# Altium PCB PCB1.PcbDoc
Units mil, origin at the board's own origin, x right, y up, seen from the top; angles counter-clockwise.
Board outline 2485 x 2065 mil, 2 copper layers (Top Layer, Bottom Layer); 29 components, 20 nets, 92 pads, 14 vias.
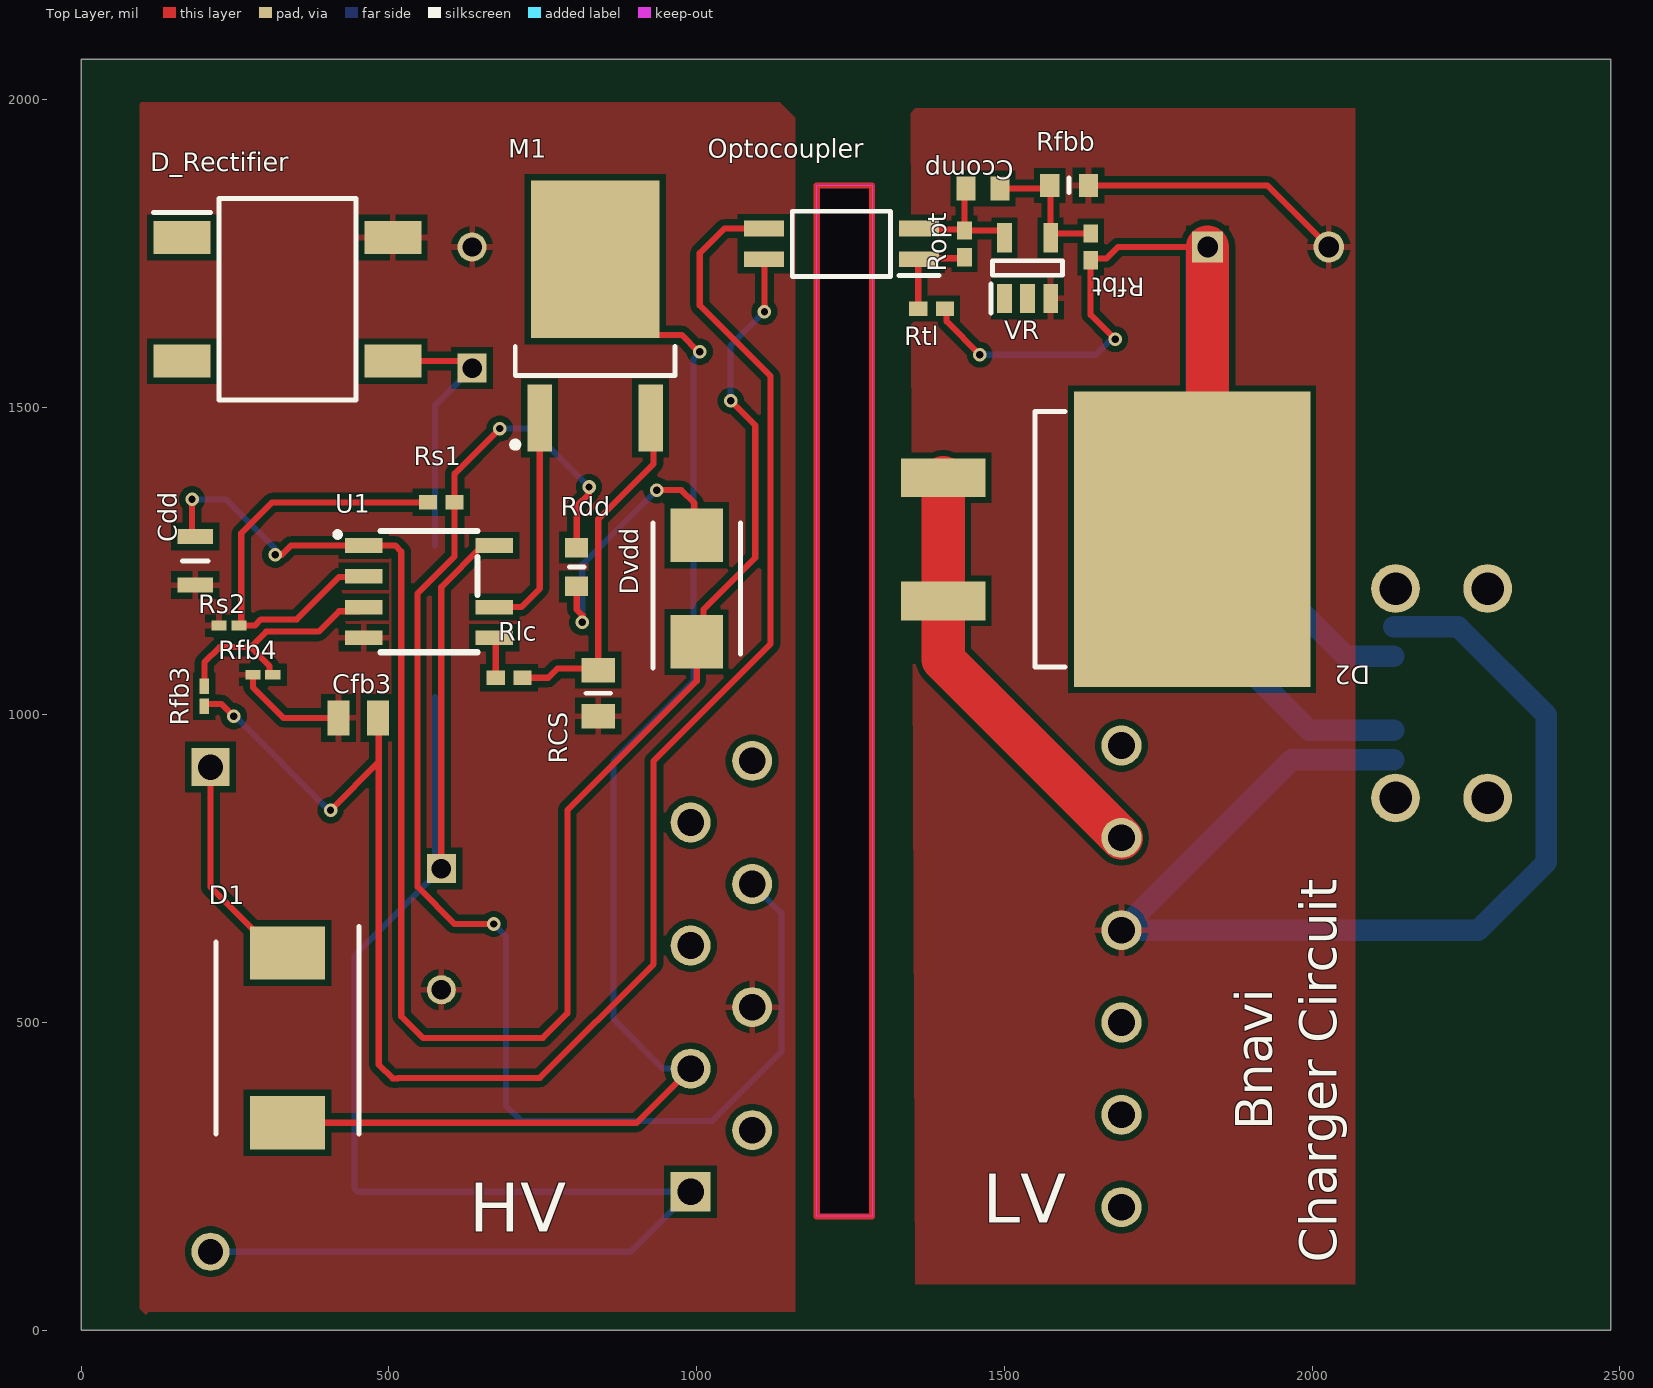
[diagram p0: Top Layer view]
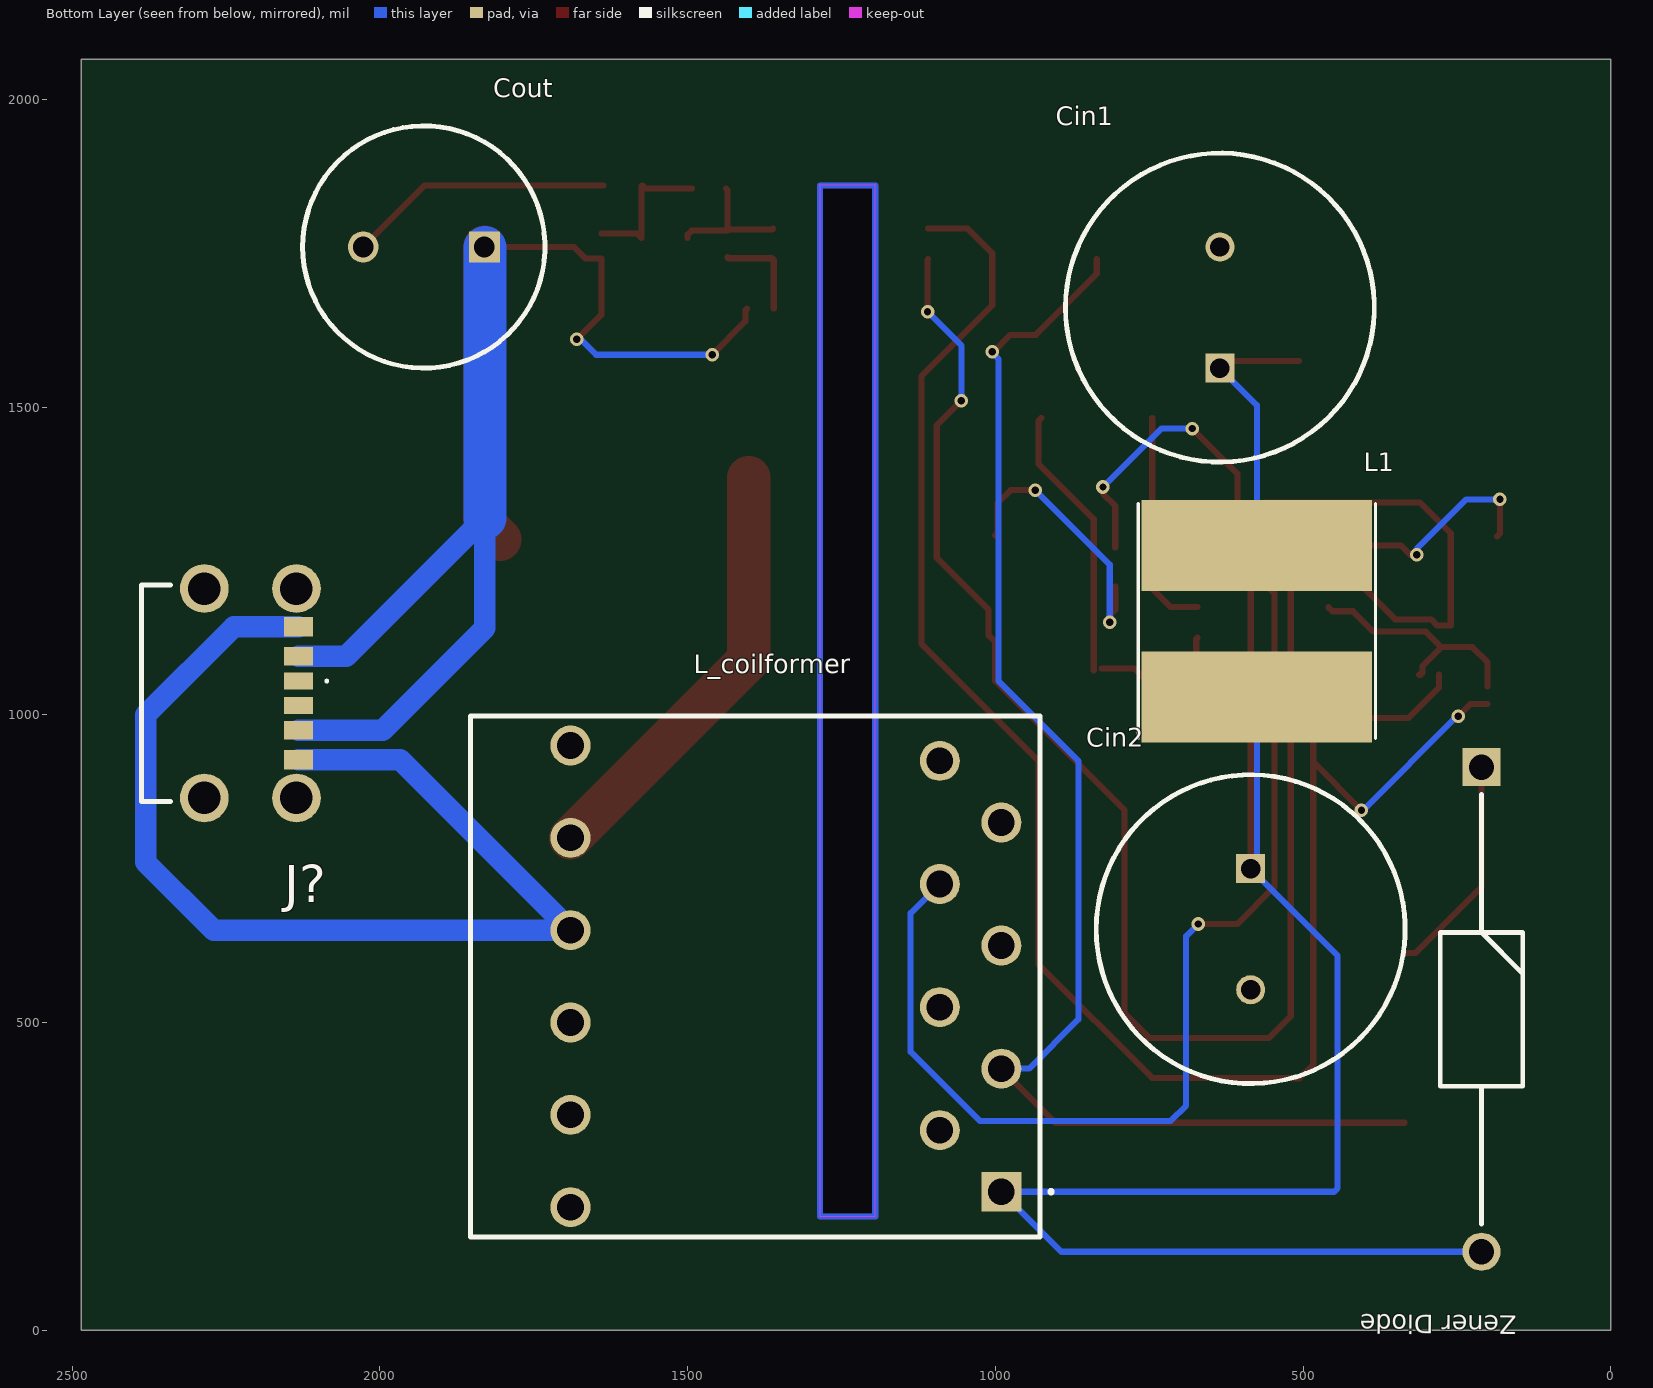
[diagram p1: Bottom Layer view, seen from below]
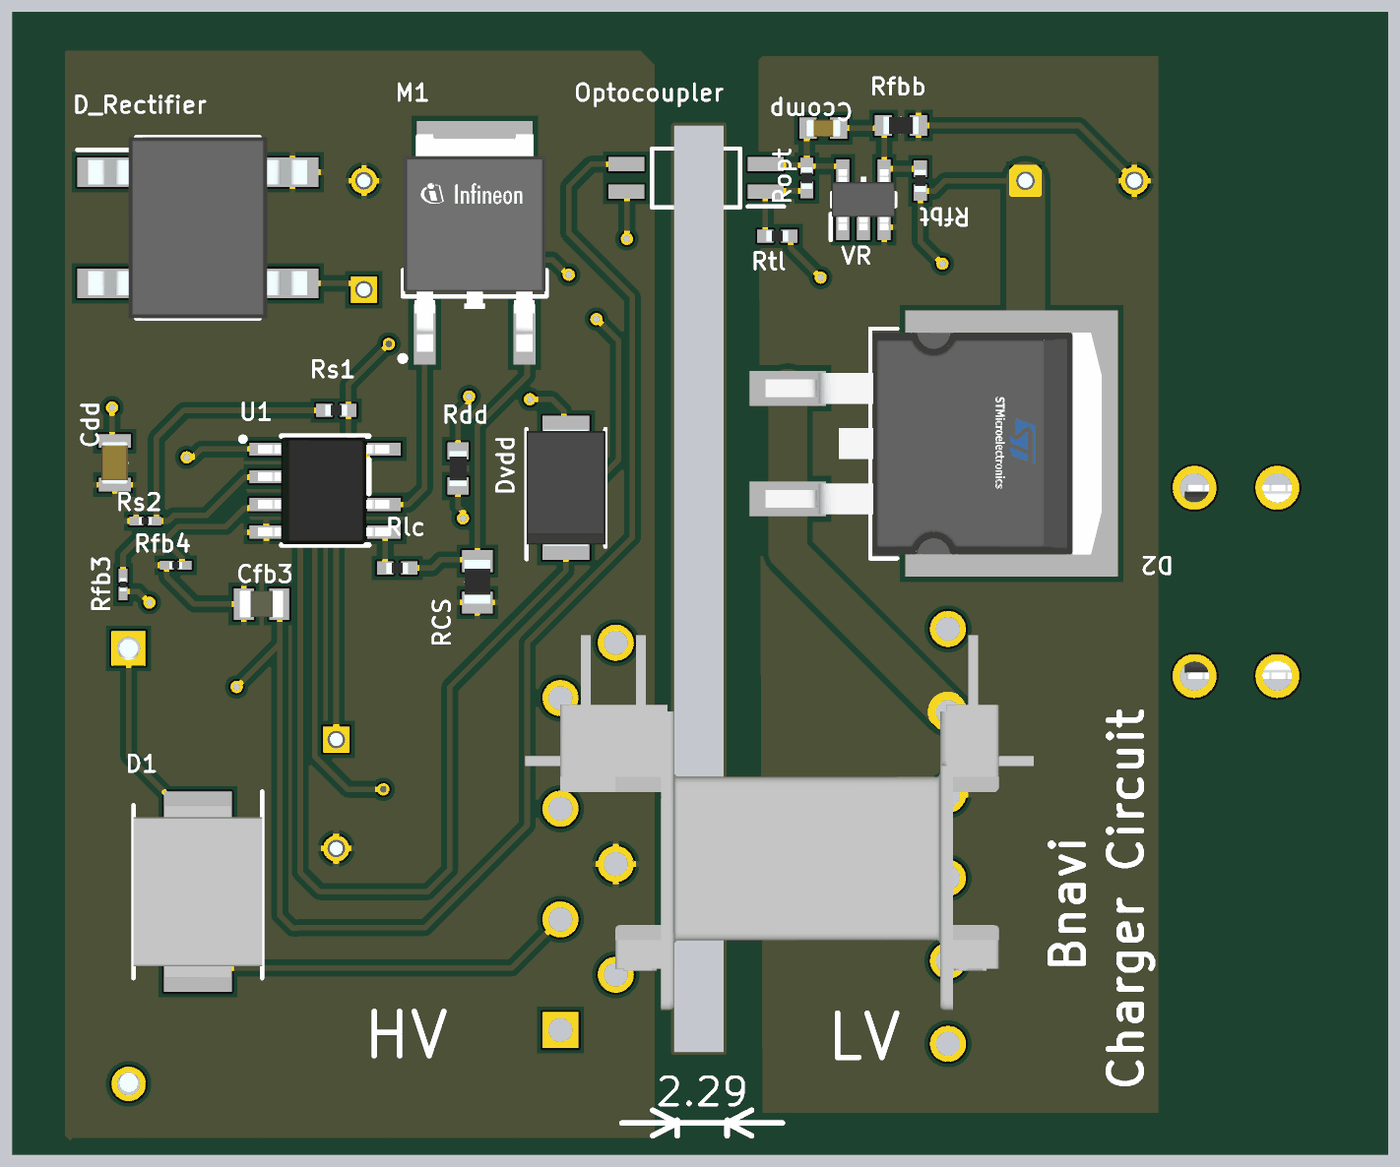
[diagram p2: 3D render of the assembled board from above, using the file's embedded part models]
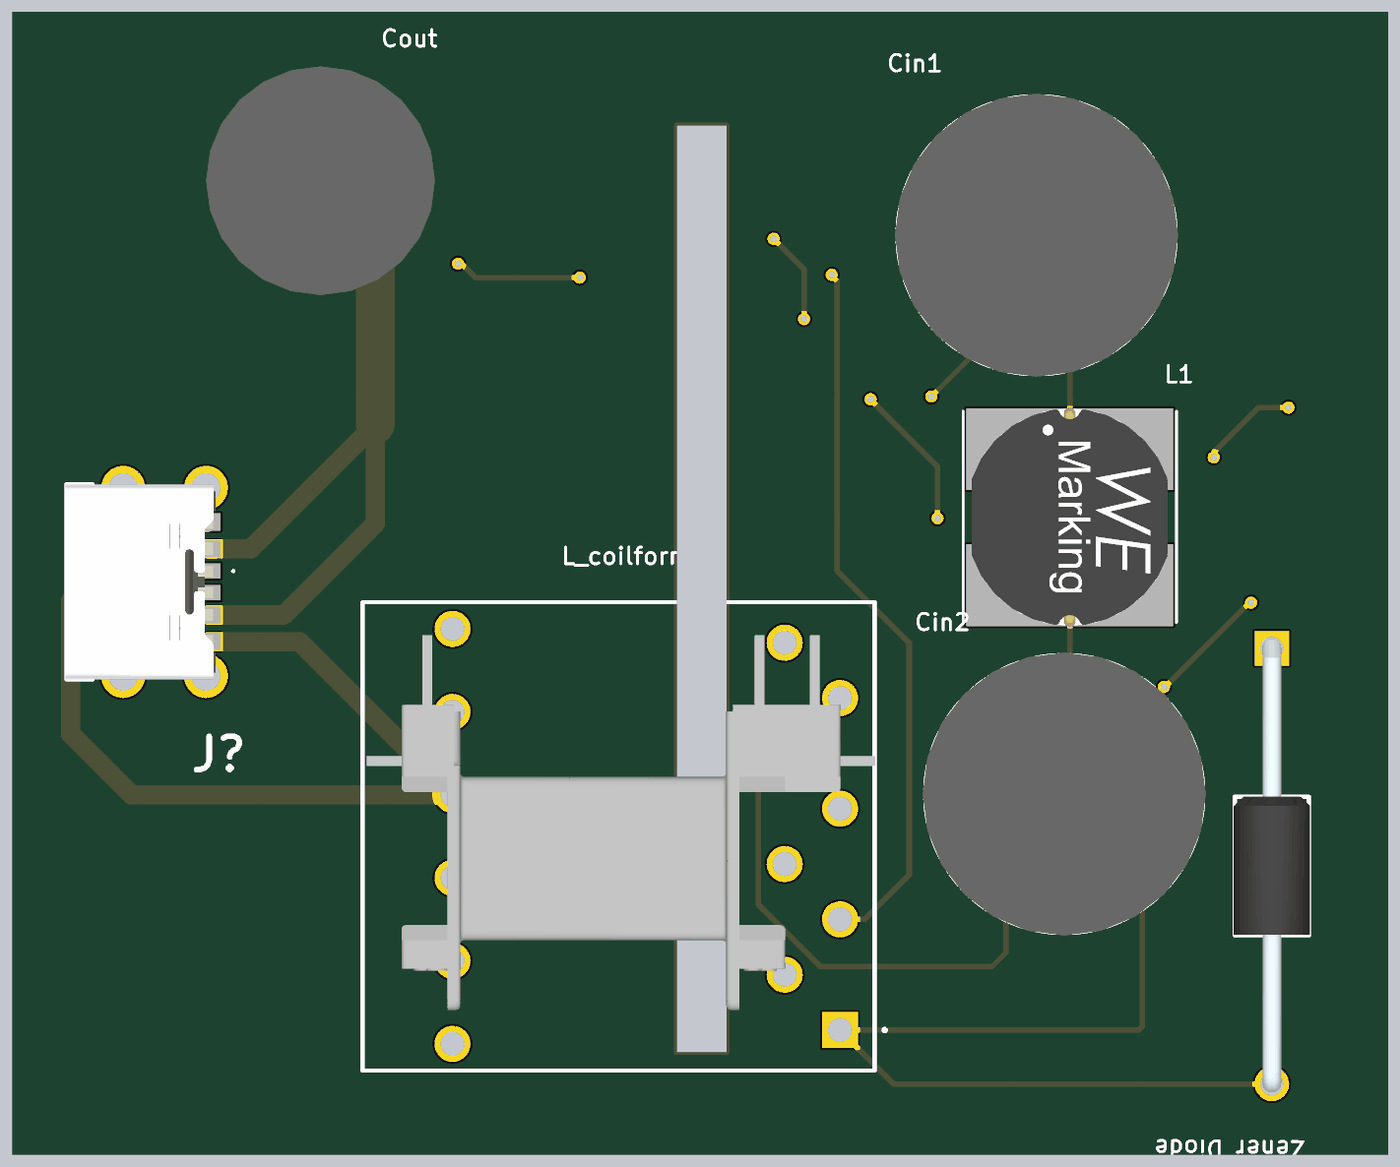
[diagram p3: 3D render of the assembled board from below, using the file's embedded part models]

## Layer stack, top to bottom
Top Solder: solder mask 0.4, Solder Resist, Dk 3.5
Top Layer: signal copper 1.4
Dielectric 1: dielectric 12.6, FR-4, Dk 4.8
Bottom Layer: signal copper 1.4
Bottom Solder: solder mask 0.4, Solder Resist, Dk 3.5

## Board outline
2485,2065 2485,0 0,0 0,2065
cut-out: 1195,185 1195,1860 1285,1860 1285,185

## Design rules (kind name [scope] priority, off if disabled: settings)
Clearance [All] p1: gap=10 ignorepadtopadclearanceinfootprint=FALSE except(0: Arc-Hole Track-Hole SMDPad-Hole THPad-Hole Via-Hole Fill-Hole Poly-Hole Region-Hole Text-Hole)
PolygonConnect [All] p1: connectstyle=Relief reliefconductorwidth=10 reliefentries=4 polygonreliefangle="90 Angle" airgapwidth=10
RoomDefinition Charger_group2 [InComponentClass('Charger_group2')] p1: confinementstyle=ConfineIn formatcopy=TRUE lockcomponents=FALSE outline -865,-3030 1135,-3030 1135,-2030 -865,-2030
RoutingVias [All] p1: holewidth=28 width=50 viastyle="Through Hole" minholewidth=28 minwidth=50 maxholewidth=28 maxwidth=50
SolderMaskExpansion [All] p1: expansion=4 istentingtop=FALSE
Width [All] p1: maxlimit=10 minlimit=10 preferedwidth=10
30 further rules are at their usual default settings.

## Components (designator, comment, footprint, x,y, rotation, side; value= is the part's Value field where it differs from the comment)
Ccomp "850 pf" CAPC1608X90N 1465,1855 r180 top
Cdd "4.7 uF" CAPC2012X145N 185,1250 r90 top
Cfb3 "100nF" CAPC2013X94N 450,995 r180 top
Cin1 "22 uF" CAPPRD500W60D1275H2200 635,1563.15 r90 bottom
Cin2 "22 uF" CAPPRD500W60D1275H2200 585,750 r270 bottom
Cout "1000 uF" CAPPRD500W65D1000H2700 1830,1760 r0 bottom
D1 "VF@Io =1.12V" DIOM7959X262N 335,475 r270 top
D2 "STPS20M100SG-TR" FP-STPS20M100SG-TR-MFG 1664.25,1285 r270 top
D_Rectifier "DF10SA-E3_77" SOP510P1005X330-4N 335,1675 r0 top
Dvdd "VF@Io =1.2V" DIOM5436X330N 1000,1205 r90 top
J? "USB4125-GF-A-0190" USB4125GFA0190 2253.5,1034.92 r270 bottom
L1 "470 uH" WE-PD2_105455 575,1151.97 r270 bottom
L_coilformer "B66206C1014T001" B66206C1014T001 990,225 r180 bottom
M1 "IPD80R1K0CE" TO229P994X241-3N 835,1611.06 r90 top
Optocoupler "PS2811-1-F3-K-A" SOIC127P700X210-4N 1235,1765 r180 top
RCS "910 mOhm" RESC2012X60N 840,1035 r90 top
Rdd "22 Ohm" RESC1608X55N 805,1240 r270 top
Rfb3 "18.7 kOhm" RESC0603X26N 200,1030 r90 top
Rfb4 "18.7 kOhm" RESC0603X26N 295,1065 r180 top
Rfbb "39 kOhm" RESC1608X55N 1605,1860 r180 top
Rfbt "118 kOhm" RESC1005X40N 1640,1760 r270 top
Rlc "2.15 kOhm" RESC1005X40N 695,1060 r0 top
Ropt "1 kOhm" RESC1005X40N 1435,1765 r90 top
Rs1 "118 KOhm" RESC1005X40N 585,1345 r180 top
Rs2 "36.5 kohm" RESC0603X26N 240,1145 r0 top
Rtl "1.07 kOhm" RESC1005X40N 1381.65,1660 r0 top
U1 "UCC28740DR" D(R-PDSO-G7) 565,1200 r270 top
VR "LMV431CM5_NOPB" SOT95P280X145-5N 1537.4,1725.79 r90 top
"Zener Diode" "P6KE110A-E3_54" DIOAD1995W86L635D340 210,915 r270 bottom

## Footprints (in the part's own frame and the unit in brackets; to place one, negate y for a bottom-side part, rotate by r counter-clockwise, add the part's x,y. Pads: shape width x height; smd on the part's side, far side on the other; paste and mask are expansions set on the pad)
B66206C1014T001 [mm]
  rect 1.65x1.65 hole 1.1: 1(0,0)
  round 1.65 hole 1.1: 2(-2.54,2.54) 3(0,5.08) 4(-2.54,7.62) 5(0,10.16) 6(-2.54,12.7) 7(0,15.24) 8(-2.54,17.78) 9(-17.78,18.415) 10(-17.78,14.605) 11(-17.78,10.795) 12(-17.78,6.985) 13(-17.78,3.175) 14(-17.78,-0.635)
  silkscreen extent -21.91,-1.86 2.1,19.64, body extent -21.72,0.93 1.62,18.13, height 10.75
CAPC1608X90N [mm]
  rect 0.78x0.99 smd: 1(-0.7,0) 2(0.7,0)
  body extent -0.8,-0.41 0.8,0.41, height 0.9
CAPC2012X145N [mm]
  rect 0.62x1.47 smd: 1(-1,0) 2(1,0)
  silkscreen extent 0,-0.53 0,0.53, body extent -1,-0.63 1,0.63, height 1.45
CAPC2013X94N [mil]
  rect 36x57 smd: 1(-32,0) 2(32,0)
  body extent -40,-25 40,25, height 37
CAPPRD500W60D1275H2200 [mm]
  rect 1.2x1.2 hole 0.8: 1(0,0)
  round 1.2 hole 0.8: 2(5,0)
  silkscreen extent -3.87,-6.37 8.87,6.38, body extent -4,-6.5 9,6.5, height 22
CAPPRD500W65D1000H2700 [mm]
  rect 1.275x1.275 hole 0.85: 1(0,0)
  round 1.275 hole 0.85: 2(5,0)
  silkscreen extent -2.5,-5 7.5,5, body extent -2.75,-5.25 7.75,5.25, height 27
D(R-PDSO-G7) [mm]
  rect 0.6x1.55 smd: 1(-1.905,-2.7) 2(-0.635,-2.7) 3(0.635,-2.7) 4(1.905,-2.7) 5(1.905,2.7) 6(0.635,2.7) 7(-1.905,2.7)
  silkscreen extent -2.5,-3.86 2.5,2, body extent -2.45,-3.08 2.45,2.94, height 1.63
DIOAD1995W86L635D340 [mm]
  rect 1.575x1.575 hole 1.05: 1(0,0)
  round 1.575 hole 1.05: 2(20,0)
  silkscreen extent 1.14,-1.7 18.86,1.7, body extent -0.43,-1.75 20.38,1.75, height 3.5
DIOM5436X330N [mm]
  rect 2.2x2.15 smd: 1(-2.2,0) 2(2.2,0)
  silkscreen extent -3.27,-1.81 2.7,1.81, body extent -2.7,-1.81 2.7,1.81, height 3.3
DIOM7959X262N [mm]
  rect 2.2x3.1 smd: 1(-3.5,0) 2(3.5,0)
  silkscreen extent -4.6,-2.95 3.97,2.95, body extent -3.97,-2.95 3.97,2.95, height 2.31
FP-STPS20M100SG-TR-MFG [mm]
  rect 1.6x3.5 smd paste+0 mask+0: 1(-2.54,-6.7) 3(2.54,-6.7)
  rect 12.2x9.75 smd paste+0 mask+0: 4(0,3.575)
  silkscreen extent -5.28,-2.91 5.28,-1.68, body extent -6.2,-8.55 6.2,8.55, height 0.25
RESC0603X26N [mm]
  rect 0.625x0.4 smd: 1(-0.412,0) 2(0.412,0)
  body extent -0.3,-0.15 0.3,0.15, height 0.26
RESC1005X40N [mm]
  rect 0.75x0.6 smd: 1(-0.55,0) 2(0.55,0)
  body extent -0.5,-0.25 0.5,0.25, height 0.4
RESC1608X55N [mm]
  rect 0.8x0.95 smd: 1(-0.8,0) 2(0.8,0)
  silkscreen extent 0,-0.3 0,0.3, body extent -0.8,-0.4 0.8,0.4, height 0.55
RESC2012X60N [mm]
  rect 1x1.4 smd: 1(-0.95,0) 2(0.95,0)
  silkscreen extent 0,-0.5 0,0.5, body extent -1,-0.6 1,0.6, height 0.6
SOIC127P700X210-4N [mm]
  rect 1.65x0.65 smd: 1(-3.2,0.635) 2(-3.2,-0.635) 3(3.2,-0.635) 4(3.2,0.635)
  silkscreen extent -4.03,-1.35 2.02,1.35
SOP510P1005X330-4N [mm]
  rect 2.35x1.35 smd: 1(-4.35,2.55) 2(-4.35,-2.55) 3(4.35,-2.55) 4(4.35,2.55)
  silkscreen extent -5.53,-4.16 2.83,4.16, body extent -5.02,-4.16 5.02,4.16, height 3.3
SOT95P280X145-5N [mm]
  rect 1.2x0.6 smd: 1(-1.25,0.95) 2(-1.25,0) 3(-1.25,-0.95) 4(1.25,-0.95) 5(1.25,0.95)
  silkscreen extent -1.85,-1.45 0.3,1.5, body extent -1.4,-1.45 1.4,1.45, height 1.2
TO229P994X241-3N [mm] "TO,2.29mm pitch;2 pin,9.94mm L X 6.095mm W X 2.41mm H body"
  rect 2.75x1 smd paste+0 mask+0: 1(-3.275,2.29) 3(-3.275,-2.29)
  rect 6.5x5.3 smd paste+0 mask+0: 2(3.275,0)
  silkscreen extent -4.5,-3.3 -0.32,3.42, body extent -4.06,-3.25 5.92,3.25, height 2.36
USB4125GFA0190 [mm]
  rect 0.7x1.2 smd: A5(-0.5,3.08) B5(0.5,3.08)
  rect 0.76x1.2 smd: A9(1.52,3.08) B9(-1.52,3.08)
  rect 0.8x1.2 smd: A12(2.75,3.08) B12(-2.75,3.08)
  round 2.01 hole 1.34: MH1(-4.32,3) MH2(-4.32,-0.8) MH3(4.32,-0.8) MH4(4.32,3)
  silkscreen extent -4.47,-3.4 4.47,4.3, body extent -4.47,-3.45 4.47,3.45, height 3.26
WE-PD2_105455 [mm]
  rect 3.75x9.5 smd: 1(-3.125,0) 2(3.125,0)
  silkscreen extent -4.86,-4.89 4.84,4.89, body extent -5.04,-4.5 5.05,4.5, height 5.4

## Part data
Ccomp: library part 06031C851JAT2A, "Capacitor", Manufacturer_Name=AVX, Mouser Part Number=581-06031C851JAT2A, Datasheet Link=https://componentsearchengine.com/Datasheets/1/06031A100FAT2A.pdf, Height=0.9mm, Manufacturer_Part_Number=06031C851JAT2A, Mouser Price/Stock=https://www.mouser.co.uk/ProductDetail/AVX/06031C851JAT2A?qs=Q0wCMCRSJ1uRTlT%2F3ACAEg%3D%3D
Cdd: library part CGA4J1X7R1V475K125AC, "Capacitor", Manufacturer_Name=TDK, Mouser Part Number=810-CGA4J1X7R1V475KC, Arrow Part Number=CGA4J1X7R1V475K125AC, Arrow Price/Stock=https://www.arrow.com/en/products/cga4j1x7r1v475k125ac/tdk, Datasheet Link=https://product.tdk.com/system/files/dam/doc/product/capacitor/ceramic/mlcc/catalog/mlcc_automotive_general_en.pdf, Height=1.45mm, Manufacturer_Part_Number=CGA4J1X7R1V475K125AC, Mouser Price/Stock=https://www.mouser.co.uk/ProductDetail/TDK/CGA4J1X7R1V475K125AC/?qs=xLDY6iXSiQZ6d6YyEJDECQ%3D%3D
Cfb3: library part 08053C104JAZ2A, "Capacitor", Manufacturer_Name=AVX, Mouser Part Number=581-08053C104JAZ2A, Arrow Part Number=08053C104JAZ2A, Arrow Price/Stock=https://www.arrow.com/en/products/08053c104jaz2a/avx, Manufacturer_Part_Number=08053C104JAZ2A, Mouser Price/Stock=https://www.mouser.co.uk/ProductDetail/AVX/08053C104JAZ2A?qs=YtXa1zY%252Bjw7108MDhSwtdw%3D%3D
Cin1 Cin2: library part 400PK22MEFC12.5X20, "Capacitor Polarised", Manufacturer_Name=Rubycon, Mouser Part Number=232-400PK22MEFC125X2, Datasheet Link=http://www.rubycon.co.jp/en/catalog/e_pdfs/aluminum/e_pk.pdf, Height=22mm, Manufacturer_Part_Number=400PK22MEFC12.5X20, Mouser Price/Stock=https://www.mouser.co.uk/ProductDetail/Rubycon/400PK22MEFC12.5X20?qs=T3oQrply3y%252B1A0DQVCmdTw%3D%3D
Cout: library part EEU-FC1C102, "Capacitor Polarised", Manufacturer_Name=Panasonic, Mouser Part Number=667-EEU-FC1C102, Arrow Part Number=EEU-FC1C102, Arrow Price/Stock=https://www.arrow.com/en/products/eeu-fc1c102/panasonic, Datasheet Link=http://industrial.panasonic.com/cdbs/www-data/pdf/RDF0000/ABA0000C1209.pdf, Height=27mm, Manufacturer_Part_Number=EEU-FC1C102, Mouser Price/Stock=https://www.mouser.co.uk/ProductDetail/Panasonic/EEU-FC1C102/?qs=bcjYS4nEpcecXuFNFyrCMQ%3D%3D
D1: library part CD214C-F3600, "Diode", Manufacturer_Name=Bourns, Mouser Part Number=652-CD214C-F3600, Arrow Part Number=CD214C-F3600, Arrow Price/Stock=https://www.arrow.com/en/products/cd214c-f3600/bourns, Datasheet Link=https://datasheet.datasheetarchive.com/originals/distributors/SFDatasheet-7/sf-000140118.pdf, Height=2.62mm, Manufacturer_Part_Number=CD214C-F3600, Mouser Price/Stock=https://www.mouser.co.uk/ProductDetail/Bourns/CD214C-F3600?qs=TkkmMb5HBbQTesSVRPXLkQ%3D%3D
D2: library part CMP-12187-000010-1, "DIODE SCHOTTKY 100V 20A D2PAK", Forward Current=20A, Manufacturer=STMicroelectronics, Max Junction Temp=+150°C, Max Repetitive Reverse Voltage=100V, Max Surge Forward Current=350A, Peak Reverse Current=10uA, Temperature="to +150°C", Automotive=No, Category=Diode, ComponentLink2Description=Datasheet, ComponentLink2URL=https://www.st.com/resource/en/datasheet/stps20m100s.pdf, Device Class L1="Discrete Semiconductors", Device Class L2=Diodes, Device Class L3="Schottky Diodes", Digikey Description="DIODE SCHOTTKY 100V 20A D2PAK", Height=4.85mm, Lead Free=Yes, Manufacturer Part Number=STPS20M100SG-TR, Mouser Description="Schottky Diodes & Rectifiers 20A 100V", Octopart=https://octopart.com/stps20m100sg-tr-stmicroelectronics-17669033, Package=STPS20M100SG-TR, RoHS=TRUE, Standoff Height=0mm, Temperature Range High=+150°C
D_Rectifier: "Diode", Arrow Part Number=DF10SA-E3/77, Manufacturer_Name=Vishay, Mouser Part Number=625-DF10SA-E3, Arrow Price/Stock=https://www.arrow.com/en/products/df10sa-e377/vishay?region=nac, Datasheet Link=http://uk.rs-online.com/web/p/products/7005403, Height=3.3mm, Manufacturer_Part_Number=DF10SA-E3/77, Mouser Price/Stock=https://www.mouser.co.uk/ProductDetail/Vishay-General-Semiconductor/DF10SA-E3-77?qs=lTgc38YOCCojApEJ5g6z7g%3D%3D
Dvdd: library part UFS180Je3_TR13, "Diode", Arrow Part Number=UFS180JE3/TR13, Manufacturer_Name="Microsemi Corporation", Manufacturer_Part_Number=UFS180Je3/TR13, Mouser Part Number=494-UFS180JE3/TR13, Arrow Price/Stock=https://www.arrow.com/en/products/ufs180je3tr13/microsemi, Datasheet Link=https://media.digikey.com/pdf/Data%20Sheets/Microsemi%20PDFs/UFS160J-UFS180J.pdf, Height=3.3mm, Mouser Price/Stock=https://www.mouser.co.uk/ProductDetail/Microchip-Microsemi/UFS180Je3-TR13?qs=pU29NIZ4ZwBQwIY5BrOkmA%3D%3D
J?: "Connector", Manufacturer_Name="GCT (GLOBAL CONNECTOR TECHNOLOGY)", Mouser Part Number=640-USB4125-GF-A-190, Datasheet Link=https://eu.mouser.com/datasheet/2/837/usb4125-2448699.pdf, Height=3.41mm, Manufacturer_Part_Number=USB4125-GF-A-0190, Mouser Price/Stock=https://www.mouser.co.uk/ProductDetail/GCT/USB4125-GF-A-0190?qs=QNEnbhJQKvbCz4hEJBS24w%3D%3D
L1: library part 744776247, "Inductor", Manufacturer_Name="Wurth Elektronik", Mouser Part Number=710-744776247, Manufacturer_Part_Number=744776247, Mouser Price/Stock=https://www.mouser.com/Search/Refine.aspx?Keyword=710-744776247
L_coilformer: "Inductor", Manufacturer_Name=TDK, Datasheet Link=https://product.tdk.com/system/files/dam/doc/product/ferrite/ferrite/ferrite-acc/data_sheet/80/db/fer/e_20_10_6.pdf, Height=13.9mm, Manufacturer_Part_Number=B66206C1014T001
M1: "CoolMos CE 800V Power Transistor", Manufacturer="Infineon Technologies", ManufacturerPartNumber=IPD80R1K0CE, PackageReference="PG-TO252 (DPAK)"
Optocoupler: "Integrated Circuit", Manufacturer_Name=CEL, Mouser Part Number=551-PS2811-1-F3-K-A, Arrow Part Number=PS2811-1-F3-K-A, Arrow Price/Stock=https://www.arrow.com/en/products/ps2811-1-f3-k-a/california-eastern-laboratories, Datasheet Link=https://datasheet.datasheetarchive.com/originals/distributors/Datasheets_SAMA/e00520b14130937508b53ebe3d73e62e.pdf, Height=2.1mm, Manufacturer_Part_Number=PS2811-1-F3-K-A, Mouser Price/Stock=https://www.mouser.com/Search/Refine.aspx?Keyword=551-PS2811-1-F3-K-A
RCS: library part CRM0805-FX-R910ELF, "Resistor", Manufacturer_Name=Bourns, Mouser Part Number=652-CRM0805FXR910ELF, Arrow Part Number=CRM0805-FX-R910ELF, Arrow Price/Stock=https://www.arrow.com/en/products/crm0805-fx-r910elf/bourns, Datasheet Link=http://www.bourns.com/data/global/pdfs/CRM0805_1206_2010.pdf, Height=0.6mm, Manufacturer_Part_Number=CRM0805-FX-R910ELF, Mouser Price/Stock=https://www.mouser.co.uk/ProductDetail/Bourns/CRM0805-FX-R910ELF?qs=%2FxfeZyN5VBe746z4RDJfyw%3D%3D
Rdd: library part RC0603FR-0722RL, "Resistor", Manufacturer_Name=YAGEO, Mouser Part Number=603-RC0603FR-0722RL, Datasheet Link=http://www.farnell.com/datasheets/1868787.pdf, Height=0.55mm, Manufacturer_Part_Number=RC0603FR-0722RL, Mouser Price/Stock=https://www.mouser.co.uk/ProductDetail/YAGEO/RC0603FR-0722RL?qs=diQw95jMAeMOsxb8bne7fg%3D%3D
Rfb3: library part RC0201FR-07205KL, "Resistor", Manufacturer_Name=YAGEO, Mouser Part Number=603-RC0201FR-07205KL, Arrow Part Number=RC0201FR-07205KL, Arrow Price/Stock=https://www.arrow.com/en/products/rc0201fr-07205kl/yageo?region=nac, Datasheet Link=https://www.arrow.com/en/products/rc0201fr-07205kl/yageo?region=nac, Height=0.26mm, Manufacturer_Part_Number=RC0201FR-07205KL, Mouser Price/Stock=https://www.mouser.co.uk/ProductDetail/YAGEO/RC0201FR-07205KL?qs=Q4gDqC5t5%2FBvVGk%2FbPsM0A%3D%3D
Rfb4: library part RC0201FR-0718K7L, "Resistor", Manufacturer_Name=KEMET, Mouser Part Number=603-RC0201FR-0718K7L, Arrow Part Number=RC0201FR-0718K7L, Arrow Price/Stock=https://www.arrow.com/en/products/rc0201fr-0718k7l/yageo?region=nac, Datasheet Link=https://datasheet.datasheetarchive.com/originals/distributors/Datasheets_SAMA/902f9e387b938f871d31120f5fc1d65e.pdf, Height=0.26mm, Manufacturer_Part_Number=RC0201FR-0718K7L, Mouser Price/Stock=https://www.mouser.co.uk/ProductDetail/YAGEO/RC0201FR-0718K7L?qs=Q4gDqC5t5%2FBha9qkI2Bozg%3D%3D
Rfbb: library part RC0603FR-0739KL, "Resistor", Manufacturer_Name=KEMET, Mouser Part Number=603-RC0603FR-0739KL, Datasheet Link=https://datasheet.datasheetarchive.com/originals/distributors/Datasheets_SAMA/902f9e387b938f871d31120f5fc1d65e.pdf, Height=0.55mm, Manufacturer_Part_Number=RC0603FR-0739KL, Mouser Price/Stock=https://www.mouser.co.uk/ProductDetail/Yageo/RC0603FR-0739KL?qs=diQw95jMAeOP2wB%2FELd%252BCQ%3D%3D
Rfbt Rs1: library part CRCW0402118KFKED, "Resistor", Manufacturer_Name=Vishay, Mouser Part Number=71-CRCW0402-118K-E3, Arrow Part Number=CRCW0402118KFKED, Arrow Price/Stock=https://www.arrow.com/en/products/crcw0402118kfked/vishay, Datasheet Link=http://www.vishay.com/docs/20035/dcrcwe3.pdf, Height=0.4mm, Manufacturer_Part_Number=CRCW0402118KFKED, Mouser Price/Stock=https://www.mouser.co.uk/ProductDetail/Vishay-Dale/CRCW0402118KFKED?qs=rlE3Te1NifzlSy4FZiG4wQ%3D%3D
Rlc: library part CRCW04022K15FKED, "Resistor", Manufacturer_Name=Vishay, Mouser Part Number=71-CRCW0402-2.15K-E3, Arrow Part Number=CRCW04022K15FKED, Arrow Price/Stock=https://www.arrow.com/en/products/crcw04022k15fked/vishay, Datasheet Link=http://www.vishay.com/docs/20035/dcrcwe3.pdf, Height=0.4mm, Manufacturer_Part_Number=CRCW04022K15FKED, Mouser Price/Stock=https://www.mouser.co.uk/ProductDetail/Vishay-Dale/CRCW04022K15FKED?qs=hD42E%2F8yzjpq6GeA3TML6Q%3D%3D
Ropt: library part CRCW04021K00FKEDHP, "Resistor", Manufacturer_Name=Vishay, Mouser Part Number=71-CRCW04021K00FKEDH, Arrow Part Number=CRCW04021K00FKEDHP, Arrow Price/Stock=https://www.arrow.com/en/products/crcw04021k00fkedhp/vishay?region=nac, Datasheet Link=http://www.vishay.com/docs/20035/dcrcwe3.pdf, Height=0.4mm, Manufacturer_Part_Number=CRCW04021K00FKEDHP, Mouser Price/Stock=https://www.mouser.co.uk/ProductDetail/Vishay-Dale/CRCW04021K00FKEDHP?qs=FlFvgi4rxBxFJ5cCIk6dAw%3D%3D
Rs2: library part RC0201FR-0736K5L, "Resistor", Manufacturer_Name=KEMET, Mouser Part Number=603-RC0201FR-0736K5L, Arrow Part Number=RC0201FR-0736K5L, Arrow Price/Stock=https://www.arrow.com/en/products/rc0201fr-0736k5l/yageo?region=nac, Datasheet Link=https://datasheet.datasheetarchive.com/originals/distributors/Datasheets_SAMA/902f9e387b938f871d31120f5fc1d65e.pdf, Height=0.26mm, Manufacturer_Part_Number=RC0201FR-0736K5L, Mouser Price/Stock=https://www.mouser.co.uk/ProductDetail/YAGEO/RC0201FR-0736K5L?qs=Q4gDqC5t5%2FCjo5Pvwu9LTQ%3D%3D
Rtl: library part CRCW04021K07FKED, "Resistor", Manufacturer_Name=Vishay, Mouser Part Number=71-CRCW0402-1.07K-E3, Arrow Part Number=CRCW04021K07FKED, Arrow Price/Stock=https://www.arrow.com/en/products/crcw04021k07fked/vishay, Datasheet Link=http://www.vishay.com/docs/20035/dcrcwe3.pdf, Height=0.4mm, Manufacturer_Part_Number=CRCW04021K07FKED, Mouser Price/Stock=https://www.mouser.co.uk/ProductDetail/Vishay-Dale/CRCW04021K07FKED?qs=YX%252BK5oaHNYowTrxQlLaSFA%3D%3D
U1: "Inductor", Manufacturer_Name="Texas Instruments", Mouser Part Number=595-UCC28740DR, Arrow Part Number=UCC28740DR, Arrow Price/Stock=https://www.arrow.com/en/products/ucc28740dr/texas-instruments?region=nac, Datasheet Link=http://www.ti.com/lit/gpn/ucc28740, Manufacturer_Part_Number=UCC28740DR, Mouser Price/Stock=https://www.mouser.co.uk/ProductDetail/Texas-Instruments/UCC28740DR?qs=e1ok2LiJcmZNvNsbUBmieA%3D%3D
VR: "Integrated Circuit", Arrow Part Number=LMV431CM5/NOPB, Manufacturer_Name="Texas Instruments", Mouser Part Number=926-LMV431CM5/NOPB, Arrow Price/Stock=https://www.arrow.com/en/products/lmv431cm5nopb/texas-instruments, Datasheet Link=http://www.ti.com/lit/gpn/lmv431, Height=1.45mm, Manufacturer_Part_Number=LMV431CM5/NOPB, Mouser Price/Stock=https://www.mouser.co.uk/ProductDetail/Texas-Instruments/LMV431CM5-NOPB?qs=7lkVKPoqpbYcyASsAAqMsA%3D%3D
"Zener Diode": "TVS Diode (Uni-directional)", Arrow Part Number=P6KE110A-E3/54, Manufacturer_Name=Vishay, Mouser Part Number=625-P6KE110A-E3, Arrow Price/Stock=https://www.arrow.com/en/products/p6ke110a-e354/vishay, Datasheet Link=https://www.vishay.com/docs/88369/p6ke.pdf, Manufacturer_Part_Number=P6KE110A-E3/54, Mouser Price/Stock=https://www.mouser.co.uk/ProductDetail/Vishay-General-Semiconductor/P6KE110A-E3-54?qs=E3OxquYwg8HE0FmgxCSYSQ%3D%3D

## Via types
v1: diameter 22, hole 12, Top Layer to Bottom Layer, 14 vias

## Nets (pads, with @x,y where several pads share a name; then routed paths per layer and width w, separated by ;. In a path a pad name is that pad's centre, name@x,y a point inside that pad or via, vN(x,y) a via of type N, cw(c..) or ccw(c..) an arc to the next point about the centre after c; other vN are vias at no path point)
GND: Cdd.1 Cfb3.2 Cin1.2 Cin2.2 D_Rectifier.4 L_coilformer.4 RCS.1 Rfb4.2 Rs2.1 U1.4 | length 180.2
  Top Layer w10: Rfb4.2 278.78,1044.63 328.4,995 Cfb3.2
NetCcomp_1: Ccomp.1 Rfbb.2 Rfbt.1 VR.4 | length 236.5
  Top Layer w10: Ccomp.1 1568.5,1855 Rfbb.2 1574.8,1858.7 VR.4 1581.46,1781.65 Rfbt.1
NetCcomp_2: Ccomp.2 Optocoupler.2 Ropt.2 VR.5 | length 217.4
  Top Layer w10: Optocoupler.2 1362.66,1788.33 1433.33,1788.33 Ropt.2 ; Ccomp.2 1435,1852.56 Ropt.2 ; VR.5 1500,1779.84 1493.19,1786.65 Ropt.2
NetCdd_2: Cdd.2 Dvdd.1 Optocoupler.4 U1.1 | length 2903
  Top Layer w10: v1(180,1350) 180,1294.37 Cdd.2 ; v1(315,1260) 325.82,1260 340.82,1275 510,1275 520,1265 520,510 555,475 750,475 790,515 790,845 1000,1055 Dvdd.1 1010.84,1129.22 1010.84,1170.84 1095,1255 1095,1470 v1(1055,1510) ; Optocoupler.4 1110,1739.02 v1(1110,1655)
  Bottom Layer w10: v1(180,1350) 234.37,1350 315,1269.37 v1(315,1260) ; v1(1055,1510) 1055,1600 v1(1110,1655)
NetCfb3_1: Cfb3.1 Optocoupler.3 Rfb3.1 | length 2886
  Top Layer w10: Rfb3.1@200,1017.56 227.44,1017.56 v1(247.5,997.5) ; v1(405,845) 483.28,923.28 ; Cfb3.1 483.28,993.72 483.28,923.28 ; Optocoupler.3 1045,1790 1005,1750 1005,1665 1120,1550 1120,1115 930,925 930,595 745,410 515,410 514.14,409.14 505.86,409.14 483.28,431.72 483.28,923.28
  Bottom Layer w10: v1(247.5,997.5) 250,997.5 402.5,845 v1(405,845)
NetCin1_1: Cin1.1 D_Rectifier.3 L1.1 | length 446.5
  Top Layer w10: D_Rectifier.3 623.54,1574.61 Cin1.1
  Bottom Layer w10: L1.1 575,1503.15 Cin1.1
NetCin2_1: "Zener Diode.2" Cin2.1 L1.2 L_coilformer.1 U1.7 | length 2801.5
  Top Layer w10: Cin2.1 585,1207.4 652.6,1275 U1.7
  Bottom Layer w10: 210,127.6 892.6,127.6 L_coilformer.1 449.59,225 443.73,230.86 443.73,608.73 Cin2.1 575,760 L1.2
NetCout_1: Cout.1 D2.4 J?.A9 J?.B9 Rfbt.2 Rtl.2 | length 2543.2
  Top Layer w10: Rtl.2 1405.95,1657.35 1405.95,1639.05 v1(1460,1585) ; Rfbt.2 1640,1650 v1(1680,1610) ; Rfbt.2@1640,1741.3 1666.02,1741.3 1684.72,1760 Cout.1
  Top Layer w70: D2.4 1830,1310 Cout.1
  Bottom Layer w10: v1(1460,1585) 1648.43,1585 1673.43,1610 v1(1680,1610)
  Bottom Layer w35: J?.A9 1994.92,975.08 1829.34,1140.66 1829.34,1320 2054.57,1094.76 J?.B9
  Bottom Layer w70: 1829.34,1320 Cout.1@1829.34,1759.34
NetD1_1: "Zener Diode.1" D1.1 | length 364.4
  Top Layer w10: 210,915 210,720.08 317.28,612.8 D1.1
NetD1_2: D1.2 L_coilformer.3 M1.2 | length 2238.5
  Top Layer w10: D1.2 902.2,337.2 L_coilformer.3 ; M1.2 835,1716.38 934.33,1617.05 975.48,1617.05 1002.53,1590 v1(1005,1590)
  Bottom Layer w10: L_coilformer.3 945,425 865,505 865,925.04 995,1055.04 995,1578.14 1005,1588.14 v1(1005,1590)
NetD2_1: D2.1 D2.3 L_coilformer.10 | length 704.9
  Top Layer w70: D2.1 D2.3 1400.47,1089.53 L_coilformer.10
NetDvdd_2: Dvdd.2 Rdd.2 | length 451.9
  Top Layer w10: Rdd.2 805,1170.82 815,1160.82 815,1151 v1(814,1150) ; v1(935,1365) 975,1365 995.94,1344.06 995.94,1295.68 Dvdd.2
  Bottom Layer w10: v1(814,1150) 814,1244 v1(935,1365)
NetL_coilformer_6: L_coilformer.6 Rdd.1 Rs1.1 | length 2339.8
  Top Layer w10: v1(670,660) 606.54,660 546.38,720.16 546.38,1197.06 606.65,1257.34 606.65,1391.65 v1(680,1465) ; Rdd.1 805,1339.18 825,1359.18 v1(825,1370)
  Bottom Layer w10: v1(670,660) 690,640 690,365 715,340 1025,340 1137.48,452.48 1137.48,677.52 L_coilformer.6 ; v1(680,1465) 730,1465 v1(825,1370)
NetM1_1: M1.1 U1.6 | length 363.2
  Top Layer w10: U1.6 715,1175 744.84,1204.84 M1.1
NetM1_3: M1.3 RCS.2 Rlc.2 | length 566.2
  Top Layer w10: Rlc.2 758.76,1060 773.76,1075 RCS.2@827.6,1075 ; RCS.2 840,1317.89 930,1407.89 930,1477.28 M1.3
NetOptocoupler_1: Optocoupler.1 Ropt.1 Rtl.1 | length 155.8
  Top Layer w10: Rtl.1 1360,1739.02 Optocoupler.1 1362.66,1741.67 1433.33,1741.67 Ropt.1
NetRfb3_2: Rfb3.2 Rfb4.1 U1.3 | length 396
  Top Layer w10: Rfb3.2 200,1085 225,1110 275.17,1110 ; Rfb4.1 308.96,1065 306.08,1067.87 306.08,1079.09 275.17,1110 ; U1.3 451.89,1168.19 418.84,1168.19 385.65,1135 300.17,1135 275.17,1110
NetRlc_1: Rlc.1 U1.5 | length 65.8
  Top Layer w10: U1.5 673.35,1122.95 Rlc.1
NetRs1_2: Rs1.2 Rs2.2 U1.2 | length 705.9
  Top Layer w10: U1.2 457.75,1224.05 419.05,1224.05 350,1155 291.89,1155 281.89,1145 260,1145 260,1295 310,1345 Rs1.2
SG_GND: Cout.2 J?.A12 J?.B12 L_coilformer.11 Rfbb.1 VR.3 | length 2286.4
  Top Layer w10: Rfbb.1 1926.85,1860 Cout.2
  Bottom Layer w10: J?.A12@2121.5,915.91 J?.A12
  Bottom Layer w35: J?.A12 1966.65,926.65 L_coilformer.11 2270,650 2380,760 2380,1000 2236.81,1143.19 J?.B12
pads on no net: D_Rectifier.1 D_Rectifier.2 J?.A5 J?.B5 J?.MH1 J?.MH2 J?.MH3 J?.MH4 L_coilformer.2 L_coilformer.5 L_coilformer.7 L_coilformer.8 L_coilformer.9 L_coilformer.12 L_coilformer.13 L_coilformer.14 VR.1 VR.2

## Polygon pours and split planes (outlines as drawn)
SG_GND on Top Layer "SG_GND_L01_P002" (solid, pour order 2): 1347.5,1977.5 1355,1985 2070,1985 2070,75 1355,75
GND on Top Layer "GND_L01_P003" (solid, pour order 3): 90,1995 1135,1995 1160,1970 1160,30 110,30 105,25 95,35 95,1990

## Other copper
Multi-Layer:
  lines w10: 1195,185 1285,185 1285,1860 1195,1860 1195,185

## Silkscreen, mask and mechanical layers (free items; w line width, h text height)
Top Overlay:
  text "Bnavi" at 1935,325 h60 r90
  text "LV" at 1465,175 h80
  text "HV" at 630,160 h80
  text "Charger Circuit" at 2040.01,110 h60 r90

## Dimensions
1201,61.99 to 1291,41.99 on Top Overlay